# EAGLE board SP (EAGLE 9.4.2)
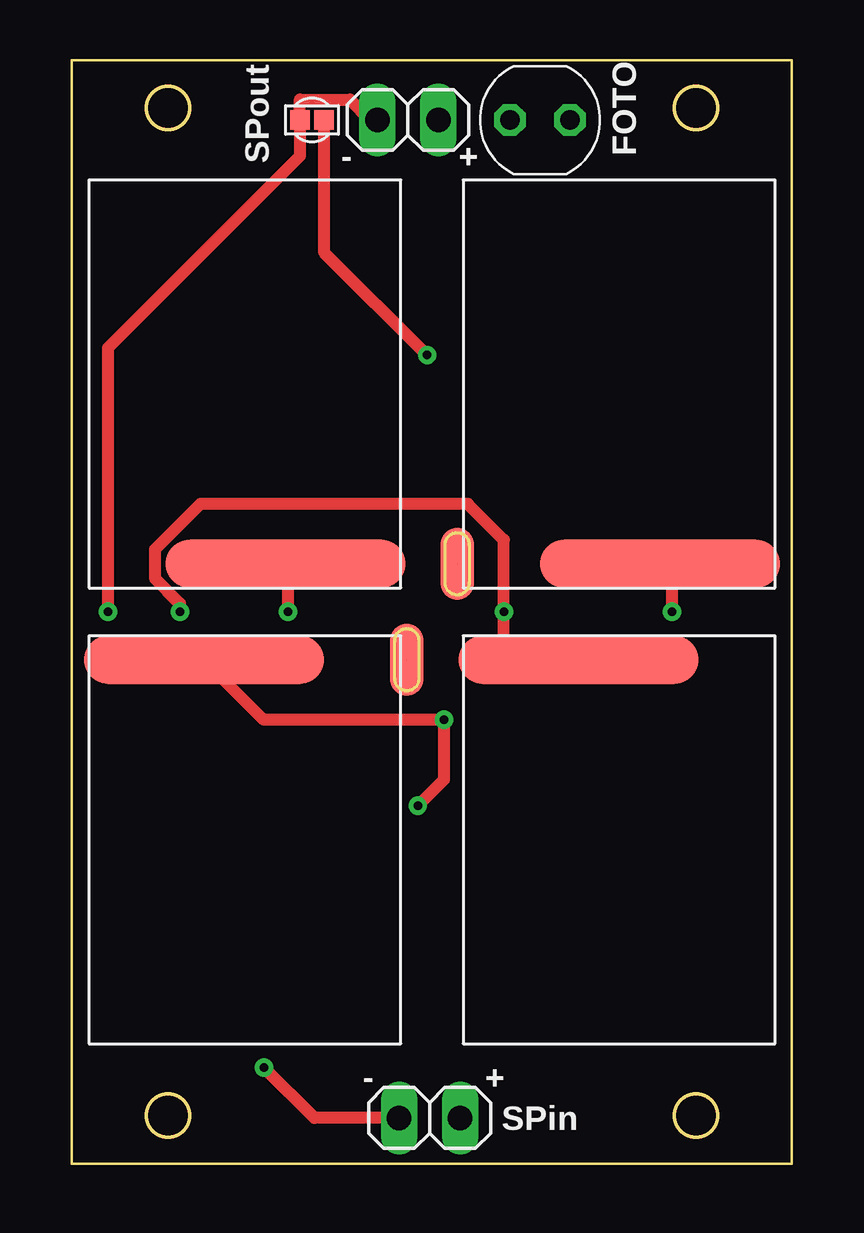
[diagram p0: board, top side]
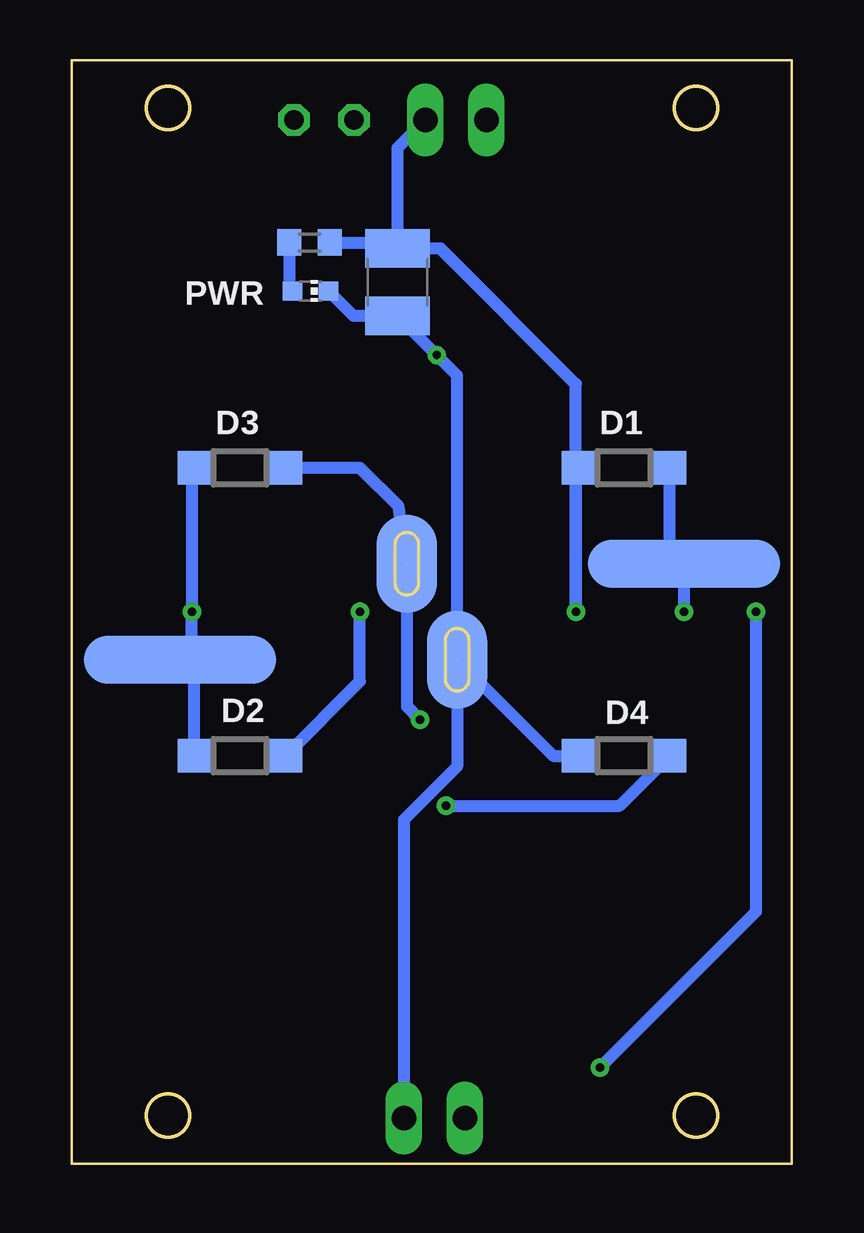
[diagram p1: board, bottom side, seen from below]

Size 30 x 46 mm. Coordinates in mm from the lower left corner, seen from the top.
Outline: 0,0 30,0 30,46 0,46 0,0
Outline: circle at 4,2 radius 0.9
Outline: circle at 26,2 radius 0.9
Outline: circle at 26,44 radius 0.9
Outline: circle at 4,44 radius 0.9
Copper layers (1*16): Top 0.035mm / dielectric 1.5mm / Bottom 0.035mm
Design rules "default *": minimum track width 0.25mm, minimum drill 0.35mm, track to track 0.2mm, track to pad 0.2mm, pad to pad 0.2mm, via to via 0.2mm, smd to smd 0.2mm, copper to edge 0.25mm, drill to drill 0.1mm, minimum pad ring 10mil, minimum via ring 8mil, stop-mask expansion 4mil, vias tented up to drill 0mil, thermal gap 10mil

## Footprints (pad centres in the part's own frame; a part is rotated, then mirrored left to right if it is on the bottom)
C1210 = smd 1.6 x 2.7: 1 -1.4,0; 2 1.4,0
SOD123 = smd 1.4 x 1.4: A 1.9,0; C -1.9,0
VT93N1-VERT = drill 0.8 octagon: P$1 -1.25,0; P$2 1.25,0
1X02 = drill 1.016 long: 1 -1.27,0; 2 1.27,0
CHIP-LED0603 = smd 0.8 x 0.8: A 0,-0.75; C 0,0.75
R0603 = smd 1 x 1.1: 1 -0.85,0; 2 0.85,0
SOLAR_1-2 = smd 2 x 10: IN-2 -7.5,-1.7 | smd 2 x 8 bottom: OUT -7.5,2.7
SOLAR_0-2 = smd 2 x 10: IN-2 -7.5,-1.7 | smd 4.1 x 2.5 bottom: OUT-2 -7.5,6.75 | smd 3 x 1.4: OUT-21 -7.5,6.75
VIAS-CONNECT = smd 0.8 x 0.8: 1 -0.5,0; 2 0.5,0

## Placement (x,y rotation side)
C1  47u  [C1210]  16.44,36.74 270 bottom
D1  MBR0520LT  [SOD123]  7,29 180 bottom
D2  MBR0520LT  [SOD123]  23,17 0 bottom
D3  MBR0520LT  [SOD123]  23,29 180 bottom
D4  MBR0520LT  [SOD123]  7,17 0 bottom
FOTO  VT93N1VERT  [VT93N1-VERT]  19.5,43.5 0 top
JP1  [1X02]  14,43.5 0 top
PWR  [CHIP-LED0603]  20.06,36.37 270 bottom
R1  2k7  [R0603]  20.1,38.39 180 bottom
SP-OUT  [1X02]  14.9,1.9 180 top
U$1  SOLAR-2_1  [SOLAR_1-2]  7.2,32.5 90 top
U$2  SOLAR-2_1  [SOLAR_1-2]  22.8,13.5 270 top
U$3  SOLAR-2_0  [SOLAR_0-2]  22.8,32.5 90 top
U$4  SOLAR-2_0  [SOLAR_0-2]  7.2,13.5 270 top
U$7  [VIAS-CONNECT]  10,43.5 180 top

## Library data of the parts
C1 = rcl; SPICEPREFIX: C
D1-D4 = diode
FOTO U$1-U$4 U$7 = KNPN-2023
JP1 SP-OUT = pinhead
PWR = led
R1 = rcl; SPICEPREFIX: R

## Nets
N$1: D1.C D2.A U$1.OUT U$2.IN-2
N$2: D2.C D3.A U$2.OUT U$3.IN-2
N$3: D3.C D4.A U$3.OUT-2 U$3.OUT-21 U$4.IN-2
N$4: PWR.A R1.2
SP+: C1.1 D1.A JP1.2 R1.1 U$1.IN-2
SP+-: C1.2 D4.C PWR.C SP-OUT.1 U$4.OUT-2 U$4.OUT-21 U$7.1
SP-: JP1.1 SP-OUT.2 U$7.2

## Tracks (layer width: path | path; a pad name or v marks a point on that pad's centre or on a via)
N$1  (via drill 0.35)
  Top 0.5: U$2.IN-2 18,21 v18,23 18,26 16.5,27.5 5.35,27.5 3.45,25.6 3.45,24.4 4.5,23.35 v4.5,23
  Bottom 0.5: D1.C 5.1,25.61 4.75,25.25 U$1.OUT v4.5,23 | D2.A 18,20.1 v18,23
N$2  (via drill 0.35)
  Top 0.5: U$3.IN-2 25,25.04 v25,23
  Bottom 0.5: D2.C 24.9,20.45 U$2.OUT 25,21.72 v25,23 25,28.9 D3.A
N$3  (via drill 0.35)  (1 unrouted)
  Top 0.5: U$4.IN-2 8,18.5 v15.5,18.5 15.5,16 v14.41,14.91
  Bottom 0.5: D3.C 18,29 16.39,27.39 U$3.OUT-21 16.05,19.05 v15.5,18.5 | 5,16.9 D4.A 7.19,14.91 v14.41,14.91
N$4
  Bottom 0.5: R1.2 20.95,36.51 PWR.A
SP+  (via drill 0.35)
  Top 0.5: U$1.IN-2 9,24.9 v9,23
  Bottom 0.5: R1.1 16.69,38.39 C1.1 | D1.A 9,28.9 v9,23 9,32.5 14.64,38.14 C1.1 | JP1.2 16.44,42.33 C1.1
SP+-  (via drill 0.35)  (1 unrouted)
  Top 0.5: U$7.1 10.5,38 v14.8,33.7
  Bottom 0.5: PWR.C 18.28,35.34 C1.2 v14.8,33.7 13.95,32.85 U$4.OUT-21 | U$4.OUT-21 9.95,17 D4.C | U$4.OUT-21 13.95,16.55 16.17,14.33 SP-OUT.1
SP-  (via drill 0.35)
  Top 0.5: SP-OUT.2 10.1,1.9 v8,4 | v1.5,23 1.5,34 9.5,42 U$7.2 9.5,44.35 11.59,44.35 12.44,43.5 JP1.1
  Bottom 0.5: v8,4 1.5,10.5 v1.5,23

## Text on the board
tNames: SPout | - | + | - | + | SPin